# EAGLE board untitled (EAGLE 6.5.0)
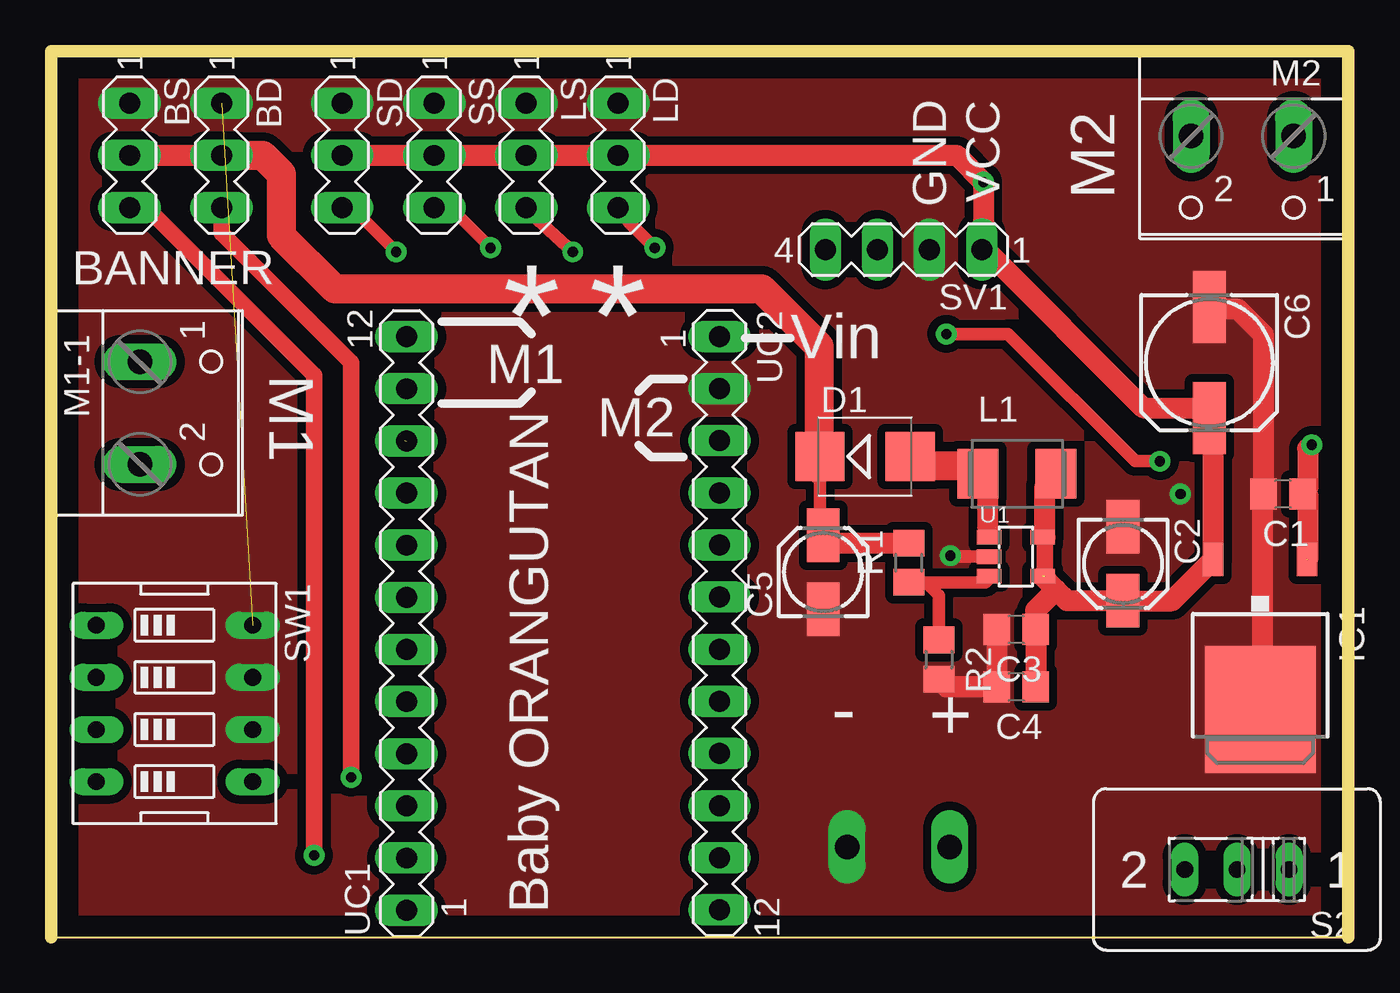
[diagram p0: board, top side]
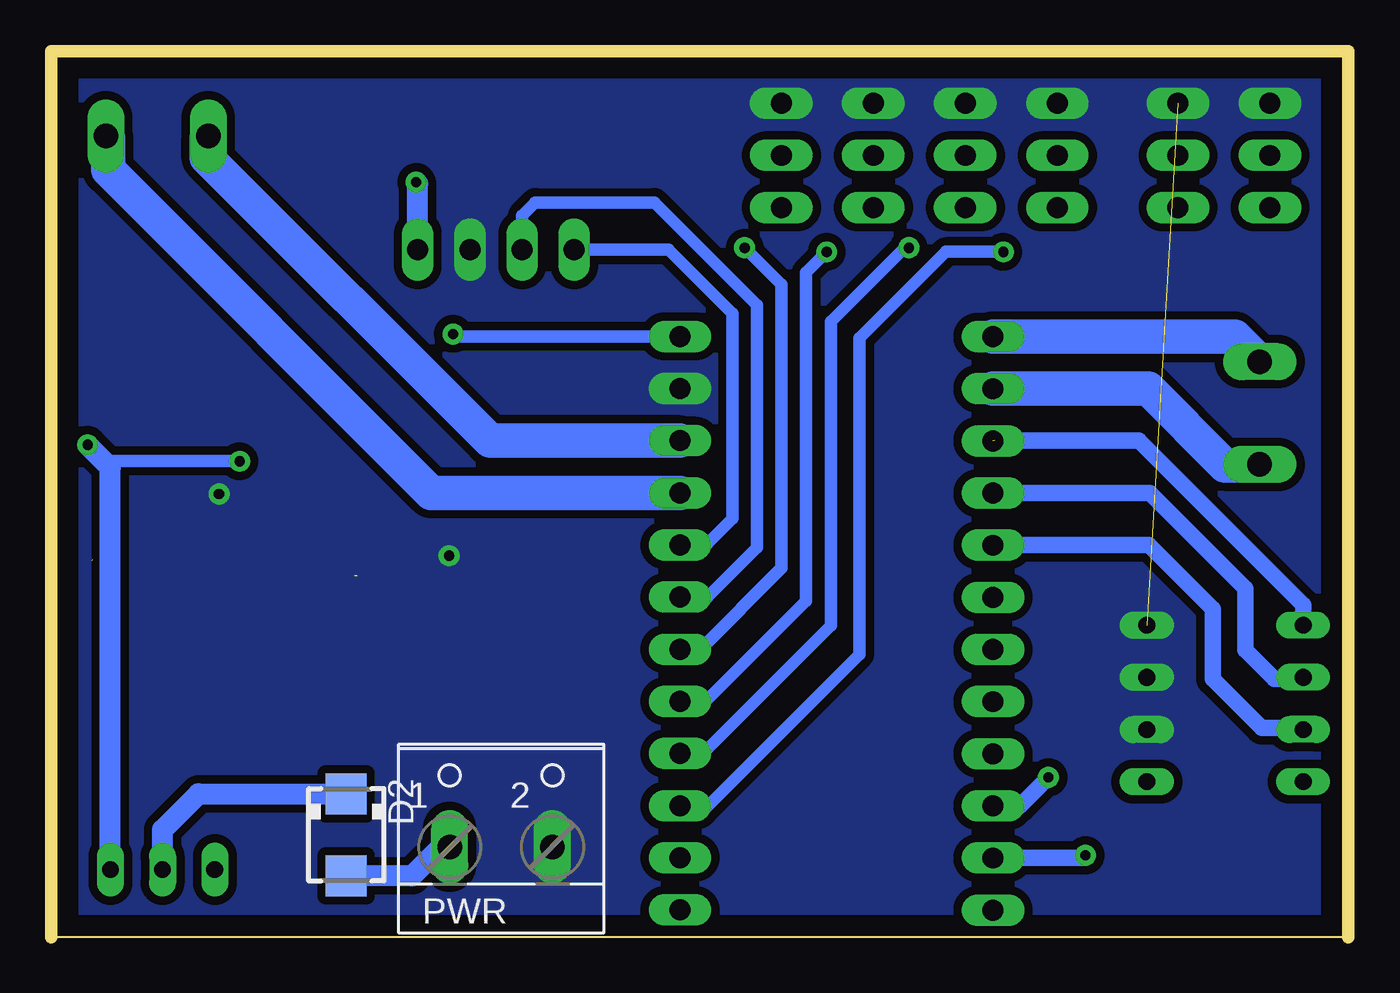
[diagram p1: board, bottom side, seen from below]

Size 63.17 x 43.17 mm. Coordinates in mm from the lower left corner, seen from the top.
Outline: 0,0 63.17,0 63.17,43.17 0,43.17 0,0
Copper layers (1*16): Top 0.035mm / dielectric 1.5mm / Bottom 0.035mm
Design rules "default": minimum track width 10mil, minimum drill 24mil, track to track 8mil, track to pad 8mil, pad to pad 8mil, via to via 8mil, smd to smd 8mil, copper to edge 40mil, drill to drill 8mil, minimum pad ring 10mil, minimum via ring 8mil, stop-mask expansion 4mil, vias tented up to drill 0mil, thermal gap 10mil

## Footprints (pad centres in the part's own frame; a part is rotated, then mirrored left to right if it is on the bottom)
MA03-1 = drill 1.016 long: 1 -2.54,0; 2 0,0; 3 2.54,0
C0805 = smd 1.3 x 1.5: 1 -0.95,0; 2 0.95,0
153CLV-0405 = smd 2.6 x 1.6: + 1.8,0; - -1.8,0
153CLV-0605 = smd 3.5 x 1.6: + 2.7,0; - -2.7,0
SMB = smd 2.4 x 2.4: A 2.2,0; C -2.2,0
SMA = smd 2 x 2: A 2,0; C -2,0
TO252 = smd 1 x 1.6: 1 -2.28,-4.8; 2 2.28,-4.8 | smd 5.4 x 6.2: 3 0,2.5
L4532M = smd 2 x 2.4: 1 -1.9,0; 2 1.9,0
W237-102 = drill 1.194 long: 1 -2.5,-1.27; 2 2.5,-1.27
R0805 = smd 1.3 x 1.5: 1 -0.95,0; 2 0.95,0
M251 = drill 0.813 long: 1 -2.54,0; 2 0,0; 3 2.54,0
MA04-1 = drill 1.016 long: 1 -3.81,0; 2 -1.27,0; 3 1.27,0; 4 3.81,0
EDG-04 = drill 0.813 long: 1 -3.81,-3.81; 2 -1.27,-3.81; 3 1.27,-3.81; 4 3.81,-3.81; 5 3.81,3.81; 6 1.27,3.81; 7 -1.27,3.81; 8 -3.81,3.81
SOT23-5 = smd 0.69 x 1.2: 1 -0.95,-1.3; 2 0,-1.3; 3 0.95,-1.3; 4 0.95,1.3; 5 -0.95,1.3
MA12-1 = drill 1.016 long: 1 -13.97,0; 2 -11.43,0; 3 -8.89,0; 4 -6.35,0; 5 -3.81,0; 6 -1.27,0; 7 1.27,0; 8 3.81,0; 9 6.35,0; 10 8.89,0; 11 11.43,0; 12 13.97,0

## Placement (x,y rotation side)
BD  [MA03-1]  8.29,38.1 270 top
BS  [MA03-1]  3.81,38.1 270 top
C1  0.33uF  [C0805]  60,21.6 180 top
C2  4.7uF  [153CLV-0405]  52.2,18.2 270 top
C3  100n  [C0805]  47,15 180 top
C4  0.1uF  [C0805]  47,12.2 180 top
C5  4.7uF  [153CLV-0405]  37.6,17.8 90 top
C6  [153CLV-0605]  56.4,28 270 top
D1  [SMB]  39.64,23.43 0 top
D2  PMEG3050EP  [SMA]  48.8,5 270 bottom
IC1  7805DT  [TO252]  58.88,13.61 180 top
L1  [L4532M]  47.04,22.59 0 top
LD  [MA03-1]  27.61,38.1 270 top
LS  [MA03-1]  23.13,38.1 270 top
M1-1  [W237-102]  5.58,25.55 270 top
M2  [W237-102]  58.02,37.77 180 top
PWR  [W237-102]  41.26,5.68 0 bottom
R1  [R0805]  41.77,18.25 90 top
R2  [R0805]  43.23,13.54 270 top
S2  [M251]  57.75,3.31 180 top
SD  [MA03-1]  14.17,38.1 270 top
SS  [MA03-1]  18.65,38.1 270 top
SV1  [MA04-1]  41.51,33.51 180 top
SW1  [EDG-04]  6,11.4 270 top
U1  LM2703-SOT23-5  [SOT23-5]  46.98,18.55 270 top
UC1  [MA12-1]  17.3,15.3 90 top
UC2  [MA12-1]  32.55,15.31 270 top

## Library data of the parts
BD BS LD LS SD SS SV1 UC1 UC2 = con-lstb; OC_FARNELL: unknown; OC_NEWARK: unknown
C1-C6 L1 R1 R2 = rcl
D1 D2 = diode
IC1 = linear
M1-1 M2 PWR = con-wago-500; MPN: 237-102; OC_FARNELL: unknown; OC_NEWARK: 70K9898
S2 = switch
SW1 = special
U1 = IC

## Nets
+5V: C2.+ C3.1 C4.1 C6.+ IC1.2 L1.2 LD.2 LS.2 SD.2 SS.2 SV1.1 U1.4 U1.5
+12V: BD.2 BS.2 C5.+ D1.C R1.2
AD6: UC2.11
GND: BD.1 BS.1 C1.2 C2.- C3.2 C4.2 C5.- C6.- IC1.3 LD.1 LS.1 PWR.2 R2.2 SD.1 SS.1 SV1.2 SW1.6 SW1.7 SW1.8 U1.2 UC2.2
M1.1: M1-1.2 UC1.11
M1.2: M1-1.1 UC1.12
M2.1: M2.2 UC2.3
M2.2: M2.1 UC2.4
N$1: D1.A L1.1 U1.1
N$3: D2.A PWR.1
N$16: D2.C S2.2
N$18: R1.1 R2.1 U1.3
PB0: SW1.1 UC1.10
PB1: SW1.2 UC1.9
PB2: SW1.3 UC1.8
PB4-NU: UC1.7
PB5-NU: UC1.6
PC0: SD.3 UC2.10
PC1: SS.3 UC2.9
PC2: LS.3 UC2.8
PC3: LD.3 UC2.7
PC4: SV1.3 UC2.6
PC5: SV1.4 UC2.5
PD0-RX: UC1.5
PD1-TX: UC1.4
PD2: BD.3 UC1.3
PD4: BS.3 UC1.2
PD7: UC1.1
RESET: UC2.12
V+: C1.1 IC1.1 S2.1 UC2.1

## Tracks (layer width: path | path; a pad name or v marks a point on that pad's centre or on a via)
+5V  (via drill 0.5 pad 1.02)  (1 unrouted)
  Top 0.813: U1.5 48.4,19.5 48.4,17.6
  Top 1.016: 48.4,19.5 48.4,22 48.94,22 L1.2 | C4.1 C3.1 47.95,15.95 48.94,16.94 | 48.94,16.94 49.48,16.4 C2.+ 54.59,16.4 IC1.2 56.6,25 56.4,25.2 C6.+ 56.4,25.4 56,25.8 53.2,25.8 45.4,33.6 v45.4,36.8 44.1,38.1 LD.2 LS.2 SS.2 SD.2 | 48.94,16.94 U1.4
  Bottom 1.016: SV1.1 45.32,36.72 v45.4,36.8
+12V
  Top 0.61: D1.C 37.44,19.76 C5.+
  Top 1.016: R1.2 37.8,19.2 C5.+ | BS.2 BD.2
  Top 1.422: BD.2 10.3,38.1 11.2,37.2 11.2,34.2 13.8,31.6 34.6,31.6 37.4,28.8 37.4,23.4 | 37.4,22.8 37.4,23.4 | 37.4,23.4 37.41,23.4 D1.C
GND  (via drill 0.5 pad 1.02)  (1 unrouted)
  Top 0.61: U1.2 43.85,18.55 v43.8,18.6
  Top 1.016: R2.2 43.62,12.2 C4.2 C3.2 | C6.- 56.5,30.6 57.8,30.6 59.05,29.35 C1.2 59,21.6 59,13.6 58.88,13.48 IC1.3
  Bottom 0.61: v43.8,18.6 43.8,18.4
  other vias: 55,21.6
  pour Bottom (isolate 0.406, rank 6, no thermals): -2.2,45.2 67.8,45.2 67.8,-2.6 -2.2,-2.6
  pour Top (isolate 0.406, rank 6, no thermals): -1.4,44.8 68.2,44.8 68.2,-2.6 -2.6,-2.6 -2.6,44.8
M1.1
  Bottom 1.676: UC1.11 9.73,26.73 6,23 4.36,23 M1-1.2
M1.2
  Bottom 1.676: UC1.12 5.53,29.27 M1-1.1
M2.1
  Bottom 1.676: UC2.3 41.8,24.2 55.6,38 55.6,38.96 M2.2
M2.2
  Bottom 1.676: UC2.4 44.66,21.66 60.4,37.4 60.4,38.92 M2.1
N$1
  Top 0.61: 45.6,20 45.6,19.58 U1.1
  Top 1.016: 45.2,22.6 45.2,22.4 45.6,22 45.6,20
  Top 1.422: D1.A 42.2,23.43 42.2,23 45.2,23 45.2,22.6 L1.1
N$3
  Bottom 1.016: PWR.1 44.19,4.41 45.6,3 D2.A
N$16
  Bottom 1.016: S2.2 57.75,5.25 56,7 49,7 48.8,6.8 D2.C
N$18
  Top 0.61: R1.1 42.6,17.3 | 42.6,17.3 45.5,17.3 45.8,17.6 U1.3 45.6,17.6 | R2.1 43.23,16.67 42.6,17.3
PB0  (1 unrouted)
  Bottom 0.813: SW1.1 2.19,16.19 10.2,24.2 17.2,24.2
PB1
  Bottom 0.813: UC1.9 9.65,21.65 5,17 5,14 3.6,12.6 2.26,12.6 SW1.2
PB2
  Bottom 0.813: UC1.8 9.71,19.11 6.6,16 6.6,12.6 4.2,10.2 2.26,10.2 SW1.3
PC0  (via drill 0.5 pad 1.02)
  Top 0.61: SD.3 14.64,35.56 v16.8,33.4
  Bottom 0.61: v16.8,33.4 19.6,33.4 23.8,29.2 23.8,13.8 31.4,6.2 32.33,6.2 UC2.10
PC1  (via drill 0.5 pad 1.02)
  Top 0.61: SS.3 19.44,35.56 v21.4,33.6
  Bottom 0.61: v21.4,33.6 21.6,33.6 25.2,30 25.2,15.2 31.6,8.8 32.39,8.8 UC2.9
PC2  (via drill 0.5 pad 1.02)
  Top 0.61: LS.3 23.13,35.47 v25.4,33.4
  Bottom 0.61: v25.4,33.4 26.4,32.4 26.4,16.4 31.4,11.4 32.45,11.4 UC2.8
PC3  (via drill 0.5 pad 1.02)
  Top 0.61: v29.4,33.6 28.2,34.77 LD.3
  Bottom 0.61: UC2.7 31.56,14.04 27.6,18 27.6,31.8 v29.4,33.6
PC4
  Bottom 0.61: SV1.3 40.24,35.16 39.6,35.8 33.8,35.8 28.8,30.8 28.8,19 31.2,16.6 32.53,16.6 UC2.6
PC5
  Bottom 0.61: SV1.4 33.11,33.51 30,30.4 30,20.4 31.2,19.2 32.47,19.2 UC2.5
PD2  (via drill 0.5 pad 1.02)
  Top 0.813: BD.3 8.29,34.31 14.6,28 v14.6,7.8
  Bottom 0.813: v14.6,7.8 16,6.4 UC1.3 | 17.4,6.4 UC1.3 | UC1.3
PD4  (via drill 0.5 pad 1.02)
  Top 0.813: v12.8,4 12.8,27.4 4.6,35.6 3.85,35.6 BS.3
  Bottom 0.813: UC1.2 12.93,3.87 v12.8,4
V+  (via drill 0.5 pad 1.02)  (1 unrouted)
  Top 0.61: v43.6,29.4 46.6,29.4 52.8,23.2 v54,23.2
  Top 1.016: 61.2,18.4 61.2,21.6 C1.1 61.2,21.85 61.2,23.8 v61.4,24
  Bottom 0.61: UC2.1 43.48,29.28 v43.6,29.4 | v54,23.2 60.6,23.2 v61.4,24
  Bottom 1.016: S2.1 60.29,22.89 v61.4,24

## Text on the board
_tsilk: GND | VCC | M2 | BANNER | * | * | Vin | M1 | M1 | M2 | - | + | Baby ORANGUTAN